# Altium PCB sion.PcbDoc (part 1 of 2)
Units mm, origin at the board's own origin, x right, y up, seen from the top; angles counter-clockwise.
Board outline 144.6 x 80.67 mm, 2 copper layers (Top Layer, Bottom Layer); 226 components, 203 nets, 882 pads, 135 vias.
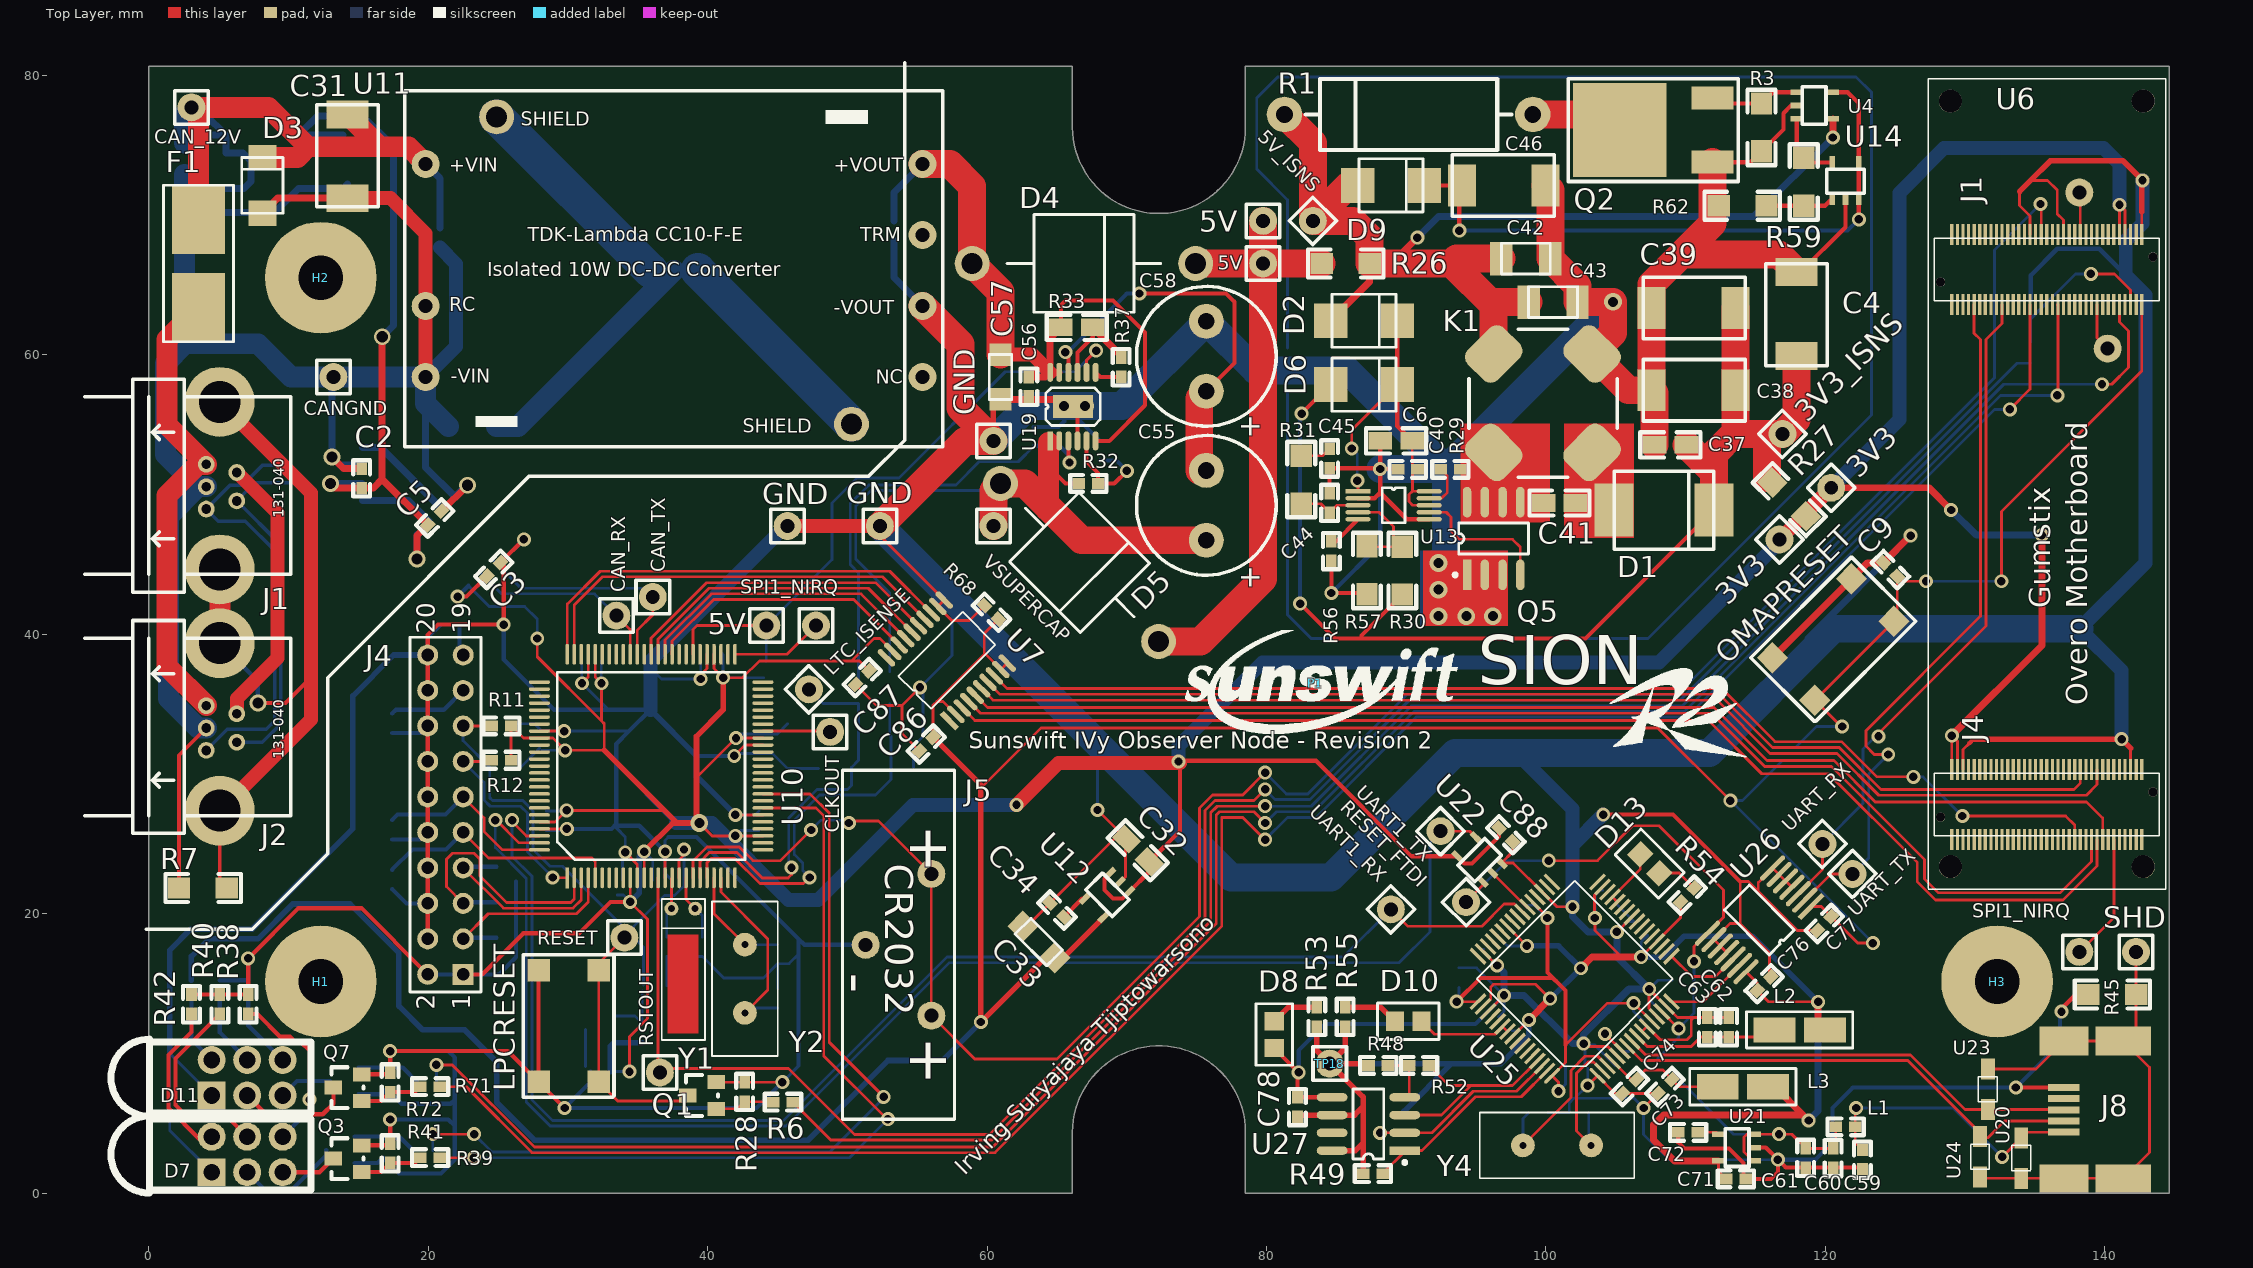
[diagram p0: Top Layer view]
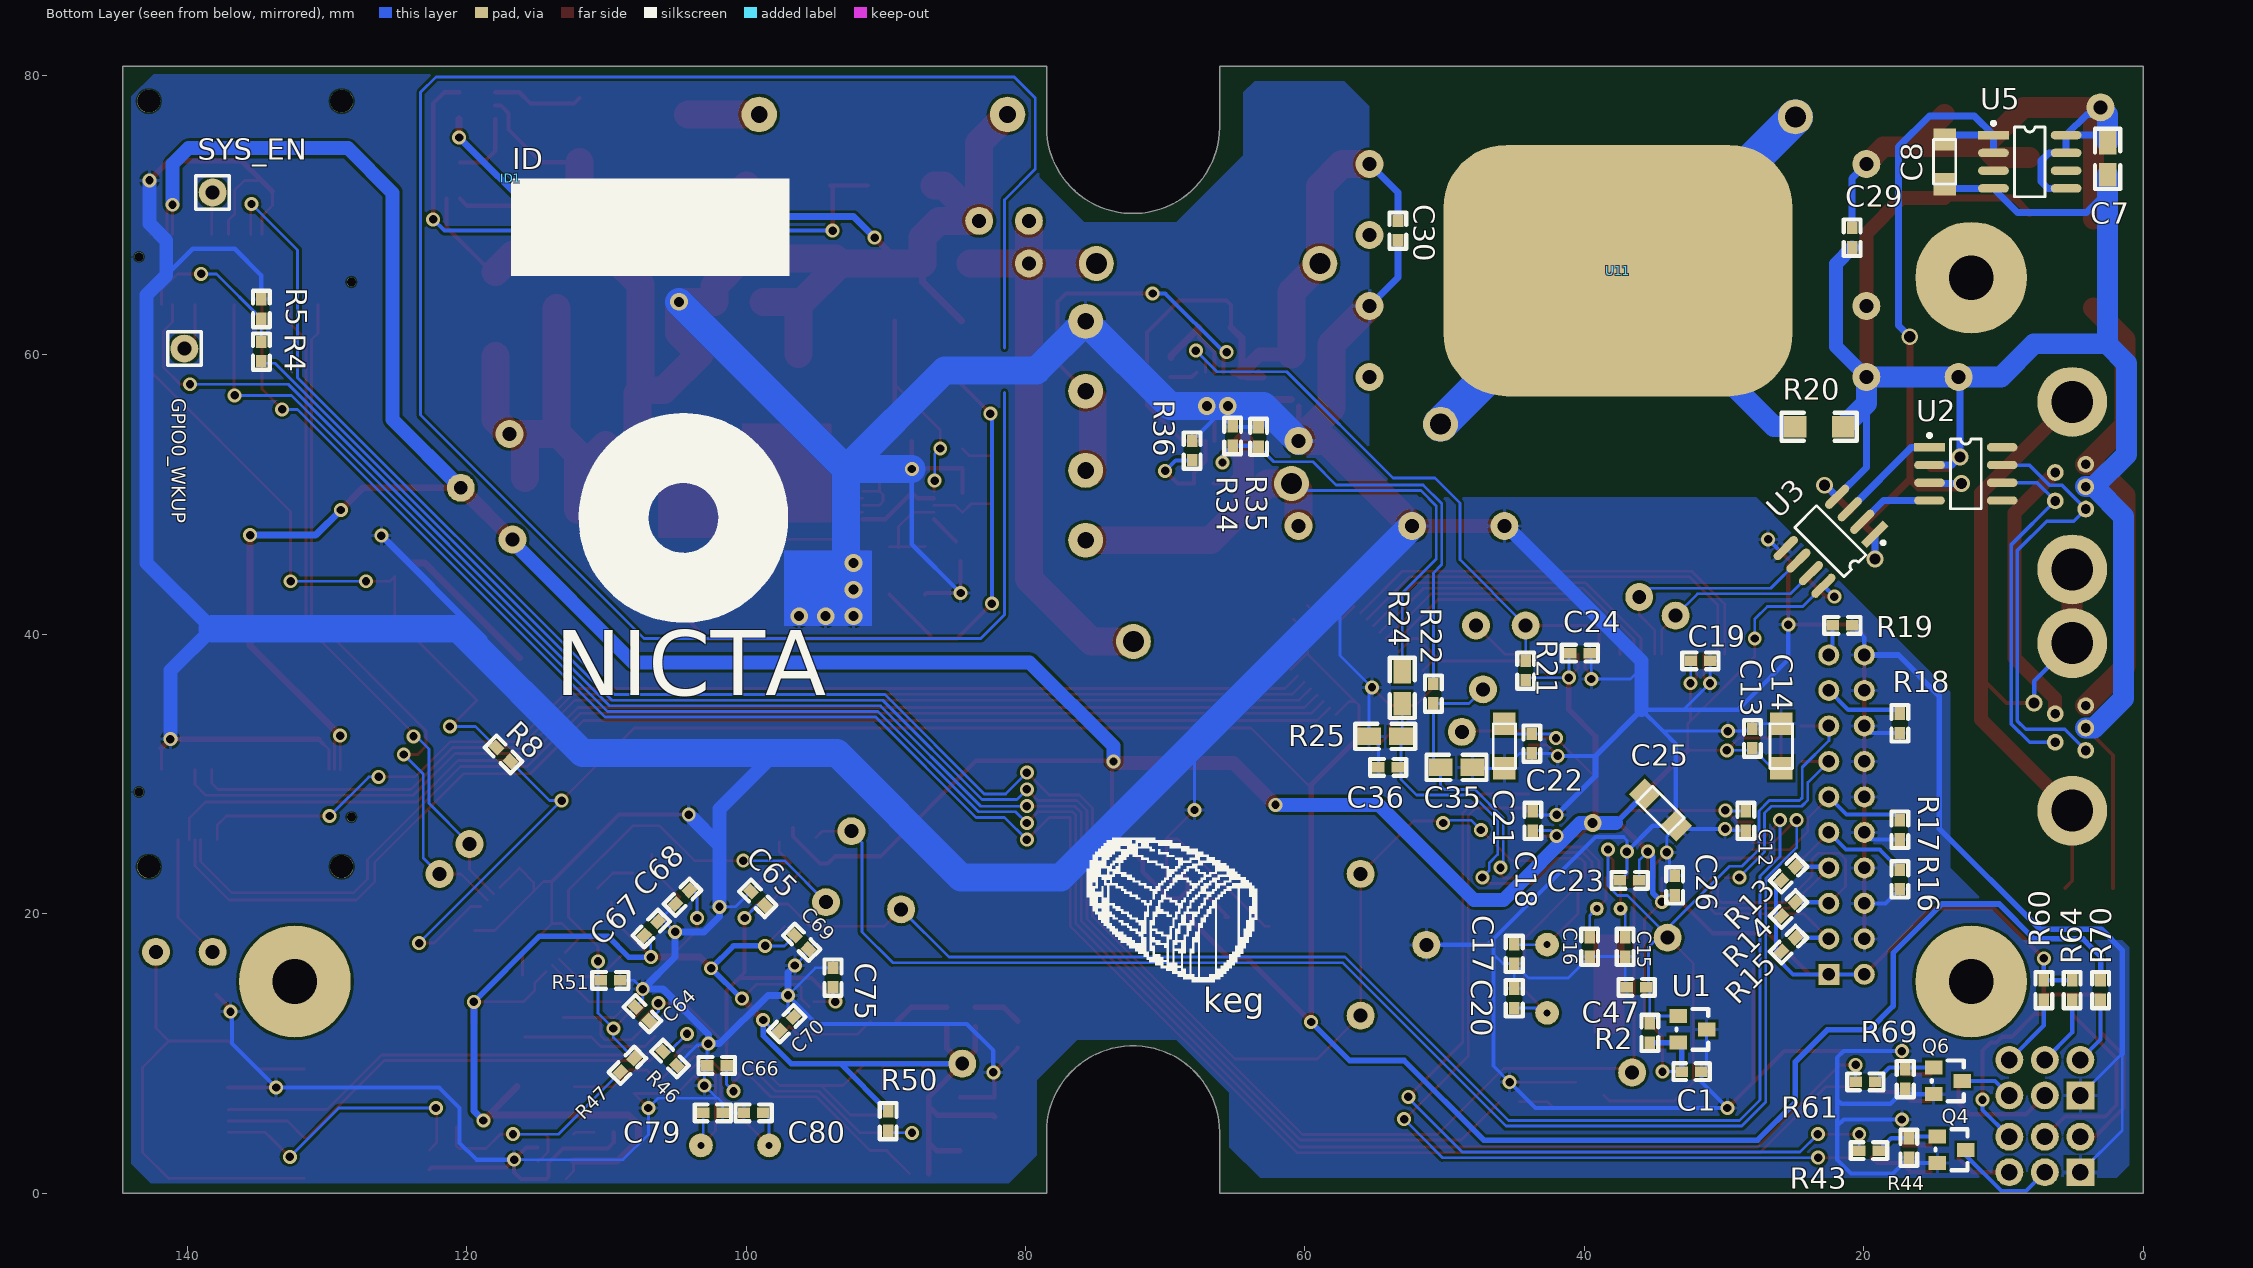
[diagram p1: Bottom Layer view, seen from below]

## Layer stack, top to bottom
Top Layer: signal copper 0.0356
Dielectric: dielectric 0.32, FR-4, Dk 4.8
Bottom Layer: signal copper 0.0356

## Board outline
0,0 0,80.67 66.11,80.67 66.11,76.31 ccw(c72.3,76.31) 78.49,76.31 78.49,80.67 144.6,80.67 144.6,0 78.49,0 78.49,4.36 ccw(c72.3,4.36) 66.11,4.36 66.11,0

## Design rules (kind name [scope] priority, off if disabled: settings)
Clearance Clearance_Overo [(InComponent('U6'))] p1: gap=0.1
Clearance [All] p2: gap=0.2
ComponentClearance [All] p1: gap=0.2 collisioncheckmode=3 verticalgap=0.254 showdistances=FALSE
PolygonConnect [All] p1: connectstyle=Relief reliefconductorwidth=0.254 reliefentries=4 polygonreliefangle="90 Angle"
RoutingVias [All] p1: holewidth=0.4 width=0.8 viastyle="Through Hole" minholewidth=0.4 minwidth=0.8 maxholewidth=1 maxwidth=2
SilkscreenOverComponentPads [All] p1: minsilkscreentomaskgap=0.254
SolderMaskExpansion [All] p1: expansion=0.102
TestPointUsage [All] p1: valid=0 allowmultiple=FALSE
Testpoint [All] p1: side=15 testpointundercomponent=TRUE minsize=1.016 maxsize=2.54 preferedsize=1.524 minholesize=0 maxholesize=1.016 preferedholesize=0.813 testpointgrid=0.025 style=1023 order=0-112345678
Width [All] p1: maxlimit=3 minlimit=0.2 preferedwidth=0.3
22 further rules are at their usual default settings.

## Classes and differential pairs
component class U_usb_isolated_uart_x2: C59 C60 C61 C62 C63 C64 C65 C66 C67 C68 C69 C70 C71 C72 C73 C74 C75 C76 C77 C78 C79 C80 C88 D8 D10 D13 J8 L1 L2 L3 R45 R46 R47 R48 R49 R50 R51 R52 R53 R54 R55 RESET_FTDI SHD TP18 U20 U21 U22 U23 U24 U25 U26 U27 UART1_RX UART1_TX UART_RX UART_TX Y4
component class U_supercap: C55 C56 C57 C58 R32 R33 R34 R35 R36 R37 U19
component class U_sepic: 3V3 3V3_ISNS 5V 5V_ISNS C4 C6 C37 C38 C39 C40 C41 C42 C43 C44 C45 C46 D1 D2 D6 D9 GND K1 Q2 Q5 R1 R3 R26 R27 R29 R30 R31 R56 R57 R59 R62 U4 U13 U14
component class U_powertrain: 3V3 5V C29 C30 C31 C32 C33 C34 C35 C36 CAN_12V CANGND D4 D5 GND J5 LTC_ISENSE R20 R21 R22 R23 R24 R25 U11 U12 VSUPERCAP
component class U_LPC1768: C12 C13 C14 C15 C16 C17 C18 C19 C20 C21 C22 C23 C24 C25 C26 J4 R11 R12 R13 R14 R15 R16 R17 R18 R19 U10 Y1 Y2
component class U_Gumstix_Overo: C9 C10 C11 J3 OMAPRESET R8 R9 R10 U6 U8 U9
component class U_can: C1 C47 C86 C87 CLKOUT D7 LPCRESET Q1 Q3 Q4 R2 R4 R5 R6 R28 R38 R39 R40 R41 R42 R43 R44 R68 RESET RSTOUT U1 U7
component class U_can_transciever_dualvolt_isolated: C2 C3 C5 C7 C8 CAN_RX CAN_TX D3 F1 J1 J2 R7 U2 U3 U5
component class toplevel_os: D11 GPIO0_WKUP H1 H2 H3 H4 ID1 P1 Q6 Q7 R60 R61 R64 R69 R70 R71 R72 SPI1_NIRQ SYS_EN

## Components (designator, comment, footprint, x,y, rotation, side; value= is the part's Value field where it differs from the comment)
3V3 "3V3" TESTPOINT 120.42,50.492 r45 top (schematic designator TP8)
3V3 "VOUT" TESTPOINT 116.711,46.784 r315 top (schematic designator TP5)
3V3_ISNS "3V3" TESTPOINT 116.924,54.344 r45 top (schematic designator TP24)
5V "VSENSE" TESTPOINT 44.196,40.64 r90 top (schematic designator TP11)
5V "5V" TESTPOINT 79.756,66.548 r0 top (schematic designator TP9)
5V "VIN" TESTPOINT 79.756,69.596 r0 top (schematic designator TP6)
5V_ISNS "5V" TESTPOINT 83.312,69.596 r135 top (schematic designator TP15)
C1 "100nF" 0603 33.016,8.7 r180 bottom
C2 "100nF" 0603 15.232,50.468 r90 top
C3 "47nF" 0603 24.188,44.151 r45 top
C4 "150uF" MCCT-CASED 117.94,59.932 r90 top
C5 "47nF" 0603 20.955,48.821 r225 top
C6 "1uF" 0805 90.424,53.848 r180 top
C7 "1uF" 0805 2.54,75.184 r270 bottom
C8 "10uF" MCCT-CASEA 14.212,73.824 r270 bottom
C9 "100nF" 0603 125.148,44.136 r135 top
C12 "100nF" 0603 28.44,25.952 r90 bottom
C13 "100nF" 0603 27.972,31.844 r90 bottom
C14 "10uF" MCCT-CASEA 25.908,32.004 r90 bottom
C15 "18pF" 0603 37.076,18.332 r270 bottom
C16 "18pF" 0603 39.616,18.332 r270 bottom
C17 "18pF" 0603 45.014,17.824 r270 bottom
C18 "100nF" 0603 43.68,25.952 r90 bottom
C19 "100nF" 0603 30.988,38.1 r0 bottom
C20 "18pF" 0603 45.014,13.252 r90 bottom
C21 "10uF" MCCT-CASEA 45.72,32.004 r270 bottom
C22 "100nF" 0603 43.76,31.48 r90 bottom
C23 "100nF" 0603 36.06,22.396 r0 bottom
C24 "100nF" 0603 39.616,38.652 r0 bottom
C25 "10uF" MCCT-CASEA 34.544,27.432 r225 bottom
C26 "100nF" 0603 33.528,21.336 r90 bottom
C29 "100nF" 0603 20.828,69.088 r270 bottom
C30 "100nF" 0603 53.34,69.596 r270 bottom
C31 "100uF" MCCT-CASED 14.224,77.216 r270 top
C32 "1uF" 0805 71.602,23.725 r135 top
C33 "10uF" MCCT-CASEA 63.699,17.977 r135 top
C34 "10nF" 0603 65.495,19.774 r135 top
C35 "1uF" 0805 50.292,30.48 r180 bottom
C36 "100nF" 0603 53.34,30.48 r0 bottom
C37 "1uF" 0805 110.056,53.564 r180 top
C38 "150uF" MCCT-CASED 113.56,57.472 r180 top
C39 "150uF" MCCT-CASED 113.56,63.372 r180 top
C40 "100nF" 0603 89.408,51.816 r0 top
C41 "10uF" 0805 99.816,49.4 r0 top
C42 "22uF" MCCT-CASEB 96.81,66.895 r0 top
C43 "22uF" MCCT-CASEB 98.758,63.787 r0 top
C44 "33p" 0603 84.512,48.716 r90 top
C45 "1n2" 0603 84.512,53.288 r270 top
C46 "470uF" MCCT-CASED 93.98,72.136 r0 top
C47 "100nF" 0603 35.56,14.732 r0 bottom
C55 "3F3" ELECTROLYTIC-5-32 75.692,46.736 r90 top
C56 "100nF" 0603 62.992,58.42 r270 top
C57 "10uF" MCCT-CASEA 60.96,58.42 r270 top
C58 "3F3" ELECTROLYTIC-5-32 75.692,57.404 r90 top
C59 "10nF" 0603 122.652,1.704 r90 top
C60 "100nF" 0603 120.552,3.204 r270 top
C61 "4.7uF" 0603 118.588,3.228 r270 top
C62 "4.7uF" 0603 113.08,11.176 r90 top
C63 "100nF" 0603 111.556,11.176 r90 top
C64 "100nF" 0603 106.925,12.344 r45 bottom
C65 "100nF" 0603 98.663,20.606 r45 bottom
C66 "100nF" 0603 101.396,9.144 r0 bottom
C67 "100nF" 0603 107.284,18.451 r135 bottom
C68 "100nF" 0603 104.051,21.684 r315 bottom
C69 "100nF" 0603 96.508,18.451 r225 bottom
C70 "100nF" 0603 97.586,11.626 r135 bottom
C71 "100nF" 0603 112.896,1.016 r0 top
C72 "10nF" 0603 110.872,4.356 r180 top
C73 "4.7uF" 0603 109.016,8.128 r225 top
C74 "100nF" 0603 106.476,8.128 r225 top
C75 "4.7uF" 0603 93.776,14.732 r90 bottom
C76 "100nF" 0603 116.11,15.488 r225 top
C77 "100nF" 0603 120.421,19.798 r225 top
C78 "100nF" 0603 82.212,5.464 r90 top
C79 "18pF" 0603 103.07,5.753 r180 bottom
C80 "18pF" 0603 98.76,5.753 r0 bottom
C86 "100nF" 0603 55.149,31.652 r45 top
C87 "100nF" 0603 51.557,37.4 r225 top
C88 "100nF" 0603 97.625,25.154 r135 top
CAN_12V "CAN12V" TESTPOINT 3.048,77.724 r0 top (schematic designator TP7)
CAN_RX "RX" TESTPOINT 33.464,41.34 r270 top (schematic designator TP3)
CAN_TX "TX" TESTPOINT 36.068,42.672 r270 top (schematic designator TP4)
CANGND "CANGND" TESTPOINT 13.208,58.42 r90 top (schematic designator TP10)
CLKOUT "CLKOUT" TESTPOINT 48.768,33.02 r90 top (schematic designator TP28)
D1 "SSC53L" SMC 108.452,48.892 r0 top
D2 "MBRS130" SMB 86.968,62.444 r0 top
D3 "SMAJ12A-TR" SMA 8.128,72.136 r90 top
D4 "D SCHOTTKY" DIODE-D1.5mm 58.928,66.548 r0 top
D5 "D SCHOTTKY" DIODE-D1.5mm 60.96,50.8 r315 top
D6 "MBRS130" SMB 86.968,57.872 r0 top
D7 "1882-2781" LED_TRILEVEL 4.5,1.5 r90 top
D8 "LED" 0805LED 80.548,12.304 r270 top
D9 "MBRS130" SMB 88.9,72.136 r0 top
D10 "LED" 0805LED 89.184,12.304 r0 top
D11 "1882-2781" LED_TRILEVEL 4.5,7 r90 top
D13 "LED" 0805LED 108.099,22.915 r135 top
F1 "125mA/3A" LITTELFUSE-154 3.556,66.548 r90 top
GND "GND" TESTPOINT 60.452,53.848 r90 top (schematic designator TP26)
GND "GND" TESTPOINT 52.324,47.752 r90 top (schematic designator TP25)
GND "GND" TESTPOINT 45.72,47.752 r90 top (schematic designator TP14)
GPIO0_WKUP "WKUP" TESTPOINT 140.208,60.452 r90 bottom (schematic designator TP17)
H1 "HOLE" #6 12.305,15.145 r0 top locked
H2 "HOLE" #6 12.305,65.525 r0 top locked
H3 "HOLE" #6 132.295,15.145 r0 top locked
ID1 "IDBOX" IDBOX 116.84,72.644 r180 bottom
J1 "CON5-S" TRIAD5F 6.296,51.584 r90 top
J2 "CON5-S" TRIAD5F 6.296,34.312 r90 top
J4 "ARM JTAG" HDR2X10 22.496,15.664 r90 top
J5 "CR2032" CR2032_VERTICAL 51.308,17.78 r270 top
J8 "USB_MINIB" USB_MINIB 137.068,5.964 r180 top
K1 "10uH" CTX2 96.26,60.068 r315 top
L1 "FERRITE" 0603 122.144,4.752 r180 top
L2 "2.2uH" 1210 118.16,11.684 r180 top
L3 "2.2uH" 1210 114.096,7.62 r180 top
LPCRESET "B3FS" B3FS-1052 33.02,16.764 r270 top
LTC_ISENSE "ISENSE" TESTPOINT 47.244,36.068 r135 top (schematic designator TP12)
OMAPRESET "B3FS" B3FS-1052 126.059,40.918 r225 top
P1 "SUN_LOGO" SUNSWIFTLOGO 83.488,36.492 r0 top
Q1 "ZXM61N02F" SOT23-3 40.612,6.04 r90 top
Q2 "S6006DS2CT-ND" DPAK_N-MOSFET 105.268,76.096 r90 top
Q3 "ZXM61N02F" SOT23-3 15.24,1.524 r90 top
Q4 "ZXM61N02F" SOT23-3 14.732,4.064 r270 bottom
Q5 "Si7882DP" SO8 96.26,46.86 r0 top
Q6 "ZXM61N02F" SOT23-3 14.996,8.988 r270 bottom
Q7 "ZXM61N02F" SOT23-3 15.24,6.604 r90 top
R1 "10R" DIODE0.7 99.06,77.216 r180 top
R2 "10K" 0603 35.312,12.172 r270 bottom
R3 "100K" 1206 115.428,74.572 r90 top
R4 "10K" 0603 134.698,60.937 r270 bottom
R5 "10K" 0603 134.698,63.985 r270 bottom
R6 "100R" 0603 44.692,6.516 r0 top
R7 "0R" 1206 5.588,21.844 r180 top
R8 "10K" 0603 117.856,31.9 r225 bottom
R11 "10k" 0603 24.528,33.444 r0 top
R12 "10k" 0603 24.528,30.988 r0 top
R13 "10k" 0603 24.892,23.368 r315 bottom
R14 "10k" 0603 24.892,20.828 r315 bottom
R15 "10k" 0603 24.892,18.288 r315 bottom
R16 "10k" 0603 17.416,21.76 r90 bottom
R17 "10k" 0603 17.416,25.316 r90 bottom
R18 "10k" 0603 17.416,32.936 r90 bottom
R19 "10k" 0603 20.828,40.64 r0 bottom
R20 "0R" 1206 24.892,54.864 r180 bottom
R21 "4k7" 0603 44.196,38.1 r270 bottom
R22 "3k3" 0603 50.8,35.052 r90 bottom
R24 "10k" 0805 53.028,37.32 r270 bottom
R25 "10k" 0805 55.404,32.7 r180 bottom
R26 "0R01" 1206 87.376,66.548 r180 top
R27 "0R01" 1206 118.616,48.442 r135 top
R28 "10K" 0603 42.644,6.548 r90 top
R29 "80R" 0603 92.456,51.816 r0 top
R30 "17K4" 1206 89.724,46.276 r270 top
R31 "26K" 1206 82.48,52.78 r270 top
R32 "309K" 0603 66.548,50.8 r0 top
R33 "173K" 0805 67.564,61.976 r180 top
R34 "1K" 0603 65.168,53.496 r90 bottom
R35 "1K" 0603 63.316,53.436 r90 bottom
R36 "100K" 0603 68.072,53.848 r270 bottom
R37 "100K" 0603 69.596,58.42 r90 top
R38 "220R" 0603 7.112,14.224 r270 top
R39 "100R" 0603 20.828,2.54 r180 top
R40 "220R" 0603 5.08,14.224 r270 top
R41 "10K" 0603 17.272,3.556 r270 top
R42 "220R" 0603 3.048,14.224 r270 top
R43 "100R" 0603 20.32,3.048 r180 bottom
R44 "10K" 0603 16.764,2.54 r90 bottom
R45 "0R" 1206 142.24,14.224 r180 top
R46 "12k" 0603 104.952,9.144 r45 bottom
R47 "4k7" 0603 108,9.652 r315 bottom
R48 "10k" 0603 88.696,9.144 r180 top
R49 "10k" 0603 88.308,1.4 r180 top
R50 "10k" 0603 89.832,4.456 r90 bottom
R51 "10k" 0603 109.016,15.24 r0 bottom
R52 "2k2" 0603 90.22,9.144 r0 top
R53 "1k" 0603 83.596,13.32 r270 top
R54 "1k" 0603 110.613,21.837 r225 top
R55 "1k" 0603 85.628,13.32 r270 top
R56 "65K" 0603 84.644,45.26 r90 top
R57 "10K" 1206 87.184,42.876 r90 top
R59 "11K3" 1206 118.452,70.676 r90 top
R60 "220R" 0603 7.112,15.24 r270 bottom
R61 "100R" 0603 20.584,7.972 r180 bottom
R62 "10K" 1206 112.356,70.676 r0 top
R64 "220R" 0603 5.08,15.24 r270 bottom
R68 "1k" 0603 59.819,42.069 r315 top
R69 "10K" 0603 17.028,7.464 r90 bottom
R70 "100R" 0603 3.048,15.24 r270 bottom
R71 "100R" 0603 20.828,7.62 r180 top
R72 "10K" 0603 17.272,8.636 r270 top
RESET "RESET" TESTPOINT 34.036,18.288 r0 top (schematic designator TP1)
RESET_FTDI "FTDI_RST" TESTPOINT 94.284,20.828 r135 top (schematic designator TP23)
RSTOUT "RSTOUT" TESTPOINT 36.576,8.636 r0 top (schematic designator TP2)
SHD "SHD" TESTPOINT 142.24,17.272 r90 top (schematic designator TP21)
SPI1_NIRQ "SPI_NIRQ_OMAP" TESTPOINT 138.176,17.272 r90 top (schematic designator TP30)
SPI1_NIRQ "SPI1_NIRQ_LPC" TESTPOINT 47.752,40.64 r90 top (schematic designator TP29)
SYS_EN "SYS_EN" TESTPOINT 138.176,71.628 r90 bottom (schematic designator TP16)
TP18 "3V3USB" TESTPOINT 84.524,9.272 r0 top
U1 "MCP120T-300I/TT" SOT23-3 33.28,12.68 r270 bottom
U2 "SN65HVD232" SO8 12.692,51.484 r270 bottom
U3 "IL712-3E" SO8 22.392,46.666 r45 bottom
U4 "MAX9100" SOT23-5 117.944,78.804 r270 top
U5 "MIC5200" SO8 8.116,73.824 r270 bottom
U6 "Overo" Overo-bare 142.748,23.368 r90 top
U7 "TXB0108PWR" TSSOP20 57.304,33.808 r135 top
U10 "LPC1768" QFP100 29.952,22.576 r90 top
U11 "TDK-LAMBDA CC-E" CC10-F-E 19.812,58.42 r0 top
U12 "MIC5247" SOT23-5 70.165,21.57 r135 top
U13 "ADP1621" MSOP10 86.544,50.24 r0 top
U14 "MAX6037CAUKADJ" SOT23-5 120.484,71.184 r0 top
U19 "LTC4425" MS-12 64.516,53.848 r90 top
U20 "PESD5V0X" SOD323 134.02,1.064 r0 top
U21 "REG113-33" SOT23-5 114.932,2.312 r90 top
U22 "SN74AHC1G126" SOT23-5 95.47,22.281 r45 top
U23 "PESD5V0X" SOD323 131.628,5.996 r0 top
U24 "PESD5V0X" SOD323 131.064,4.064 r180 top
U25 "FT2232H" QFP64 103.692,8.393 r135 top
U26 "TXB104PWR" TSSOP14-L 118.984,20.517 r225 top
U27 "93LC46BT-I/SN" SO8 87.292,4.956 r90 top
UART1_RX "RXD3V3" TESTPOINT 88.9,20.32 r45 top (schematic designator TP27)
UART1_TX "TXD3V3" TESTPOINT 92.456,25.908 r45 top (schematic designator TP19)
UART_RX "RXD1V8" TESTPOINT 119.788,25.001 r135 top (schematic designator TP20)
UART_TX "TXD1V8" TESTPOINT 121.943,22.846 r45 top (schematic designator TP22)
VSUPERCAP "VCAP" TESTPOINT 60.452,47.752 r90 top (schematic designator TP13)
Y1 "32.768 KHz" WATCHA 39.108,20.364 r180 top
Y2 "12 MHz" HC49/4H 42.664,20.872 r270 top
Y4 "12 MHz" HC49/4H 95.263,3.42 r0 top

## Footprints (in the part's own frame and the unit in brackets; to place one, negate y for a bottom-side part, rotate by r counter-clockwise, add the part's x,y. Pads: shape width x height; smd on the part's side, far side on the other; paste and mask are expansions set on the pad)
0603 [mil]
  rect 35.43x30 smd: 1(0,0) 2(55,0)
  silkscreen extent -24,-24 79,24
0805 [mm]
  rect 1.7x1.27 smd: 1(0,0) 2(2.286,0)
  silkscreen extent -1,-0.9 3.3,0.9
0805LED [mm]
  rect 1.3x1.4 smd: A(0,0) K(1.9,0)
  silkscreen extent -1.25,-1.3 3.15,1.3
1206 [mil]
  rect 62.99x60 smd: 1(0,0) 2(135,0)
  silkscreen extent -39,-39 173,39
1210 [mm]
  rect 3x1.8 smd: 1(-1.8,0) 2(1.8,0)
  silkscreen extent -3.8,-1.3 3.8,1.3
#6 [mm]
  round 8 hole 3.2: 1(0,0)
B3FS-1052 [mm] "SMD SPNO tactile switch"
  rect 1.6x1.6 smd: 1(0.8,-0.825) 2(8.8,-0.825) 3(0.8,-5.125) 4(8.8,-5.125)
  silkscreen extent -0.3,-6.22 9.9,0.28
CC10-F-E [mm]
  round 2 hole 1: 1(0,15.24) 2(0,5.08) 3(0,0) 4(35.56,0) 5(35.56,5.08) 6(35.56,10.16) 7(35.56,15.24)
  round 2.5 hole 1.5: 8(5.08,18.62) 8(30.48,-3.38)
  rrect50% 25x18 smd far side: 8(17.78,7.62)
  Bottom Layer lines w2.5: 5.08,18.62 16.08,7.62 ; 19.48,7.62 30.48,-3.38
  silkscreen extent -1.5,-5 37,20.5
CR2032_VERTICAL [mm] "VBH2032-1-LF Coin cell vertical holder"
  round 2 hole 1: 1(-5.075,4.7) 1(5.075,4.7) 2(0,0)
  silkscreen extent -12.5,-1.65 12.5,6.35
CTX2 [mm] "Coupled Inductors"
  rrect50% 3.05x3.68 smd: 1(0,0) 3(9.96,0)
  rrect50% 3.68x3.05 smd: 2(4.98,-4.98) 4(4.98,4.98)
  silkscreen extent 0,-5 10,5
DIODE0.7 [mm]
  round 2.54 hole 1.2: 1(0,0) 2(17.78,0)
  silkscreen extent 1.52,-2.54 16.26,2.54
DIODE-D1.5mm [mm]
  round 2.5 hole 1.5: A(0,0) K(16,0)
  silkscreen extent 2.5,-3.5 13.5,3.5
DPAK_N-MOSFET [mm] "STD12NF06L"
  rect 1.65x3 smd: 1(-2.3,-6.65) 3(2.3,-6.65)
  rect 6.7x6.7 smd: 2(0,0)
  silkscreen extent -3.68,-8.51 3.68,3.68
ELECTROLYTIC-5-32 [mm] "Supercapacitor"
  round 2.5 hole 1.2: 1(0,0) 2(5,0)
  silkscreen extent -2.5,-5 7.5,5
HC49/4H [mm]
  round 1.7 hole 0.5: 1(3.085,0) 2(7.965,0)
  silkscreen extent 0,-2.35 11.05,2.35
HDR2X10 [mm] "Connector; Header; 10x2 Position"
  rect 1.5x1.5 hole 0.9: 1(0,0)
  round 1.5 hole 0.9: 2(0,2.54) 3(2.54,0) 4(2.54,2.54) 5(5.08,0) 6(5.08,2.54) 7(7.62,0) 8(7.62,2.54) 9(10.16,0) 10(10.16,2.54) 11(12.7,0) 12(12.7,2.54) 13(15.24,0) 14(15.24,2.54) 15(17.78,0) 16(17.78,2.54) 17(20.32,0) 18(20.32,2.54) 19(22.86,0) 20(22.86,2.54)
  silkscreen extent -1.27,-1.27 24.13,3.81
IDBOX [mm] "Infobox"
  silkscreen extent 0,-7 19.95,0
LED_TRILEVEL [mm]
  rect 2x2 hole 1.2: 1(0,0)
  round 2 hole 1.2: 2(0,-2.54) 3(0,-5.08) 4(2.54,-5.08) 5(2.54,-2.54) 6(2.54,0)
  silkscreen extent -1.49,-7.11 4.03,7.21
LITTELFUSE-154 [mm]
  rect 5x3.81 smd: 1(-3.185,0) 2(3.185,0)
  silkscreen extent -5.6,-2.51 5.6,2.5
MCCT-CASEA [mm]
  rect 1.6x1.6 smd: 1(-1.6,0) 2(1.6,0)
  silkscreen extent -1.6,-0.8 1.6,0.8
MCCT-CASEB [mm]
  rect 1.6x2.4 smd: 1(0,0) 2(3.5,0)
  silkscreen extent 0,-1.1 3.5,1.1
MCCT-CASED [mm]
  rect 2x3 smd: 1(0,0) 2(6,0)
  silkscreen extent -0.7,-2.2 6.6,2.2
MS-12 [mm] "LTC4425"
  rect 1.364x0.42 smd: 1(0,0)
  oval 1.364x0.42 smd: 2(0,-0.65) 3(0,-1.3) 4(0,-1.95) 5(0,-2.6) 6(0,-3.25) 7(4.9,-3.25) 8(4.9,-2.6) 9(4.9,-1.95) 10(4.9,-1.3) 11(4.9,-0.65) 12(4.9,0)
  rect 1.651x2.845 smd: 13(2.45,-1.625)
  silkscreen extent 1.1,-3.58 3.8,0.33
MSOP10 [mm] "ADM1191"
  rect 1.8x0.3 smd: 1(0,0)
  oval 1.8x0.3 smd: 2(0,-0.5) 3(0,-1) 4(0,-1.5) 5(0,-2) 6(5.1,-2) 7(5.1,-1.5) 8(5.1,-1) 9(5.1,-0.5) 10(5.1,0)
  silkscreen extent 1.73,-2.25 3.37,0.25
Overo-bare [mm] "Gumstix Overo Motherboard placement"
  round 1.65 hole 1.65 unplated: 0(0,13.8) 0(0,0) 0(54.8,0) 0(54.8,13.8)
  round 0.65 hole 0.65: 0(3.55,14.5) 0(5.35,-0.7) 0(41.85,14.5) 0(43.65,-0.7)
  rect 1.5x0.23 smd: J1_1(40.25,0.1) J1_2(40.25,0.5) J1_3(40.25,0.9) J1_4(40.25,1.3) J1_5(40.25,1.7) J1_6(40.25,2.1) J1_7(40.25,2.5) J1_8(40.25,2.9) J1_9(40.25,3.3) J1_10(40.25,3.7) J1_11(40.25,4.1) J1_12(40.25,4.5) J1_13(40.25,4.9) J1_14(40.25,5.3) J1_15(40.25,5.7) J1_16(40.25,6.1) J1_17(40.25,6.5) J1_18(40.25,6.9) J1_19(40.25,7.3) J1_20(40.25,7.7) J1_21(40.25,8.1) J1_22(40.25,8.5) J1_23(40.25,8.9) J1_24(40.25,9.3) J1_25(40.25,9.7) J1_26(40.25,10.1) J1_27(40.25,10.5) J1_28(40.25,10.9) J1_29(40.25,11.3) J1_30(40.25,11.7) J1_31(40.25,12.1) J1_32(40.25,12.5) J1_33(40.25,12.9) J1_34(40.25,13.3) J1_35(40.25,13.7) J1_36(45.25,13.7) J1_37(45.25,13.3) J1_38(45.25,12.9) J1_39(45.25,12.5) J1_40(45.25,12.1) J1_41(45.25,11.7) J1_42(45.25,11.3) J1_43(45.25,10.9) J1_44(45.25,10.5) J1_45(45.25,10.1) J1_46(45.25,9.7) J1_47(45.25,9.3) J1_48(45.25,8.9) J1_49(45.25,8.5) J1_50(45.25,8.1) J1_51(45.25,7.7) J1_52(45.25,7.3) J1_53(45.25,6.9) J1_54(45.25,6.5) J1_55(45.25,6.1) J1_56(45.25,5.7) J1_57(45.25,5.3) J1_58(45.25,4.9) J1_59(45.25,4.5) J1_60(45.25,4.1) J1_61(45.25,3.7) J1_62(45.25,3.3) J1_63(45.25,2.9) J1_64(45.25,2.5) J1_65(45.25,2.1) J1_66(45.25,1.7) J1_67(45.25,1.3) J1_68(45.25,0.9) J1_69(45.25,0.5) J1_70(45.25,0.1) J4_1(6.95,13.7) J4_2(6.95,13.3) J4_3(6.95,12.9) J4_4(6.95,12.5) J4_5(6.95,12.1) J4_6(6.95,11.7) J4_7(6.95,11.3) J4_8(6.95,10.9) J4_9(6.95,10.5) J4_10(6.95,10.1) J4_11(6.95,9.7) J4_12(6.95,9.3) J4_13(6.95,8.9) J4_14(6.95,8.5) J4_15(6.95,8.1) J4_16(6.95,7.7) J4_17(6.95,7.3) J4_18(6.95,6.9) J4_19(6.95,6.5) J4_20(6.95,6.1) J4_21(6.95,5.7) J4_22(6.95,5.3) J4_23(6.95,4.9) J4_24(6.95,4.5) J4_25(6.95,4.1) J4_26(6.95,3.7) J4_27(6.95,3.3) J4_28(6.95,2.9) J4_29(6.95,2.5) J4_30(6.95,2.1) J4_31(6.95,1.7) J4_32(6.95,1.3) J4_33(6.95,0.9) J4_34(6.95,0.5) J4_35(6.95,0.1) J4_36(1.95,0.1) J4_37(1.95,0.5) J4_38(1.95,0.9) J4_39(1.95,1.3) J4_40(1.95,1.7) J4_41(1.95,2.1) J4_42(1.95,2.5) J4_43(1.95,2.9) J4_44(1.95,3.3) J4_45(1.95,3.7) J4_46(1.95,4.1) J4_47(1.95,4.5) J4_48(1.95,4.9) J4_49(1.95,5.3) J4_50(1.95,5.7) J4_51(1.95,6.1) J4_52(1.95,6.5) J4_53(1.95,6.9) J4_54(1.95,7.3) J4_55(1.95,7.7) J4_56(1.95,8.1) J4_57(1.95,8.5) J4_58(1.95,8.9) J4_59(1.95,9.3) J4_60(1.95,9.7) J4_61(1.95,10.1) J4_62(1.95,10.5) J4_63(1.95,10.9) J4_64(1.95,11.3) J4_65(1.95,11.7) J4_66(1.95,12.1) J4_67(1.95,12.5) J4_68(1.95,12.9) J4_69(1.95,13.3) J4_70(1.95,13.7)
  silkscreen extent -1.6,-1.6 56.4,15.4
QFP64 [mm]
  oval 1.5x0.25 smd: 1(0.008,-0.005)
  rect 1.5x0.25 smd: 2(0.008,-0.505) 3(0.008,-1.005) 4(0.008,-1.505) 5(0.008,-2.005) 6(0.008,-2.505) 7(0.008,-3.005) 8(0.008,-3.505) 9(0.008,-4.005) 10(0.008,-4.505) 11(0.008,-5.005) 12(0.008,-5.505) 13(0.008,-6.005) 14(0.008,-6.505) 15(0.008,-7.005) 16(0.008,-7.505) 33(12.108,-7.505) 34(12.108,-7.005) 35(12.108,-6.505) 36(12.108,-6.005) 37(12.108,-5.505) 38(12.108,-5.005) 39(12.108,-4.505) 40(12.108,-4.005) 41(12.108,-3.505) 42(12.108,-3.005) 43(12.108,-2.505) 44(12.108,-2.005) 45(12.108,-1.505) 46(12.108,-1.005) 47(12.108,-0.505) 48(12.108,-0.005)
  rect 0.25x1.5 smd: 17(2.308,-9.805) 18(2.808,-9.805) 19(3.308,-9.805) 20(3.808,-9.805) 21(4.308,-9.805) 22(4.808,-9.805) 23(5.308,-9.805) 24(5.808,-9.805) 25(6.308,-9.805) 26(6.808,-9.805) 27(7.308,-9.805) 28(7.808,-9.805) 29(8.308,-9.805) 30(8.808,-9.805) 31(9.308,-9.805) 32(9.808,-9.805) 49(9.808,2.295) 50(9.308,2.295) 51(8.808,2.295) 52(8.308,2.295) 53(7.808,2.295) 54(7.308,2.295) 55(6.808,2.295) 56(6.308,2.295) 57(5.808,2.295) 58(5.308,2.295) 59(4.808,2.295) 60(4.308,2.295) 61(3.808,2.295) 62(3.308,2.295) 63(2.808,2.295)
  oval 0.25x1.5 smd: 64(2.308,2.295)
  silkscreen extent 1.09,-8.72 11.02,1.21
QFP100 [mm]
  rect 1.5x0.25 smd: 1(0,0)
  oval 1.5x0.25 smd: 2(0,-0.5) 3(0,-1) 4(0,-1.5) 5(0,-2) 6(0,-2.5) 7(0,-3) 8(0,-3.5) 9(0,-4) 10(0,-4.5) 11(0,-5) 12(0,-5.5) 13(0,-6) 14(0,-6.5) 15(0,-7) 16(0,-7.5) 17(0,-8) 18(0,-8.5) 19(0,-9) 20(0,-9.5) 21(0,-10) 22(0,-10.5) 23(0,-11) 24(0,-11.5) 25(0,-12) 51(16,-12) 52(16,-11.5) 53(16,-11) 54(16,-10.5) 55(16,-10) 56(16,-9.5) 57(16,-9) 58(16,-8.5) 59(16,-8) 60(16,-7.5) 61(16,-7) 62(16,-6.5) 63(16,-6) 64(16,-5.5) 65(16,-5) 66(16,-4.5) 67(16,-4) 68(16,-3.5) 69(16,-3) 70(16,-2.5) 71(16,-2) 72(16,-1.5) 73(16,-1) 74(16,-0.5) 75(16,0)
  oval 0.25x1.5 smd: 26(2,-14) 27(2.5,-14) 28(3,-14) 29(3.5,-14) 30(4,-14) 31(4.5,-14) 32(5,-14) 33(5.5,-14) 34(6,-14) 35(6.5,-14) 36(7,-14) 37(7.5,-14) 38(8,-14) 39(8.5,-14) 40(9,-14) 41(9.5,-14) 42(10,-14) 43(10.5,-14) 44(11,-14) 45(11.5,-14) 46(12,-14) 47(12.5,-14) 48(13,-14) 49(13.5,-14) 50(14,-14) 76(14,2) 77(13.5,2) 78(13,2) 79(12.5,2) 80(12,2) 81(11.5,2) 82(11,2) 83(10.5,2) 84(10,2) 85(9.5,2) 86(9,2) 87(8.5,2) 88(8,2) 89(7.5,2) 90(7,2) 91(6.5,2) 92(6,2) 93(5.5,2) 94(5,2) 95(4.5,2) 96(4,2) 97(3.5,2) 98(3,2) 99(2.5,2) 100(2,2)
  silkscreen extent 1.28,-12.71 14.71,0.72
SMA [mm]
  rect 1.8x2 smd: A(-2,0) K(2,0)
  silkscreen extent -2,-1.48 2,1.48
SMB [mm]
  rect 2.4x2.5 smd: A(-2.385,0) K(2.385,0)
  silkscreen extent -2.29,-1.9 2.3,1.9
SMC [mil]
  rect 110x150 smd: A(-140.5,0) K(140.5,0)
  silkscreen extent -140,-110 140,110
SO8 [mm]
  rect 0.6x2.2 smd: 1(-1.905,-2.6)
  oval 0.6x2.2 smd: 2(-0.635,-2.6) 3(0.635,-2.6) 4(1.905,-2.6) 5(1.905,2.6) 6(0.635,2.6) 7(-0.635,2.6) 8(-1.905,2.6)
  silkscreen extent -2.88,-2.72 2.5,1.1
SOD323 [mm]
  rect 1x1.5 smd: 0(0,0) 1(0,2.9)
  silkscreen extent -0.67,0.55 0.67,2.35
SOT23-3 [mm]
  rect 1x1.25 smd: 1(0,0) 2(1.905,0) 3(0.965,2.032)
  silkscreen extent -0.51,-0.13 2.41,2.16
SOT23-5 [mm]
  rect 0.4x0.9 smd: 1(0,0) 2(0.953,0) 3(1.91,0) 4(1.91,2.59) 5(0,2.59)
  silkscreen extent -0.4,0.4 2.3,2.1
SUNSWIFTLOGO [mm] "Sunswift Logo"
  silkscreen extent -9.32,-3.58 10.19,3.81
TESTPOINT [mm] "Test point pad"
  round 2 hole 1: 0(0,0)
  silkscreen extent -1.2,-1.2 1.2,1.2
TRIAD5F [mm]
  round 5 hole 3: 0(-6.934,1.219) 0(5.055,1.219)
  round 1.2 hole 0.7: 1(0,0) 2(0.584,2.184) 3(-1.016,2.184) 4(-2.616,2.184) 5(-2.032,0)
  silkscreen extent -8.56,-3.86 6.68,10.87
TSSOP14-L [mm] "TSSOP14 extra long pads"
  rect 2.4x0.35 smd: 1(0,0)
  oval 2.4x0.35 smd: 2(0,-0.65) 3(0,-1.3) 4(0,-1.95) 5(0,-2.6) 6(0,-3.25) 7(0,-3.9) 8(6.6,-3.9) 9(6.6,-3.25) 10(6.6,-2.6) 11(6.6,-1.95) 12(6.6,-1.3) 13(6.6,-0.65) 14(6.6,0)
  silkscreen extent 2.03,-4.23 4.57,0.33
TSSOP20 [mm]
  rect 1.6x0.4 smd: 1(0,0)
  oval 1.6x0.4 smd: 2(0,-0.65) 3(0,-1.3) 4(0,-1.95) 5(0,-2.6) 6(0,-3.25) 7(0,-3.9) 8(0,-4.55) 9(0,-5.2) 10(0,-5.85) 11(6.38,-5.85) 12(6.38,-5.2) 13(6.38,-4.55) 14(6.38,-3.9) 15(6.38,-3.25) 16(6.38,-2.6) 17(6.38,-1.95) 18(6.38,-1.3) 19(6.38,-0.65) 20(6.38,0)
  silkscreen extent 1.53,-6.18 4.85,0.32
USB_MINIB [mm] "USB Mini B connector SMT"
  rect 2.25x0.5 smd mask+0: 1(0,1.6) 2(0,0.8) 3(0,0) 4(0,-0.8) 5(0,-1.6)
  rect 1.2x6.4 on Top Overlay mask+0: 2(-7.052,0)
  rect 4x2.05 smd mask+0: 6(-4.25,4.925) 6(-4.25,-4.925)
  rect 3.5x2.05 smd mask+0: 6(0,4.925) 6(0,-4.925)
WATCHA [mm]
  round 1 hole 0.5: 1(0,0) 2(1.7,0)
  Top Layer region: -0.25,1.85 2,1.85 2,8.95 -0.25,8.95
  silkscreen extent -0.7,-0.7 2.4,9.4

## Part data
3V3 3V3 3V3_ISNS 5V 5V 5V 5V_ISNS CAN_12V CAN_RX CAN_TX CANGND CLKOUT GND GND GND GPIO0_WKUP LTC_ISENSE RESET RESET_FTDI RSTOUT SHD SPI1_NIRQ SPI1_NIRQ SYS_EN TP18 UART1_RX UART1_TX UART_RX UART_TX VSUPERCAP: library part TEST, "TEST POINT"
C1 C2 C3 C5 C6 C7 C9 C12 C13 C15 C16 C17 C18 C19 C20 C22 C23 C24 C26 C29 C30 C32 C34 C35 C36 C37 C40 C44 C45 C47 C56 C59 C60 C61 C62 C63 C64 C65 C66 C67 C68 C69 C70 C71 C72 C73 C74 C75 C76 C77 C78 C79 C80 C86 C87 C88: library part CAP, "Capacitor"
C4 C8 C14 C21 C25 C31 C33 C38 C39 C42 C43 C46 C57: library part "CAP POL3", "Polarized Capacitor (Surface Mount)"
C41: library part CAP, "grm21br61a106k"
C55 C58: library part CAP-POL, "Supercap"
D1 D2 D6 D9: library part "D SCHOTTKY", "Schottky Diode"
D3: library part DIODE, "12V TVS Diode"
D4 D5: "Schottky Diode"
D7 D11: library part LED-TRILEVEL, "Three level LED"
F1: library part FUSE2, "Fuse"
H1 H2 H3: "Hole"
J1 J2: "Connector, 2 pin, with shield @ S"
J4: library part "Header 10X2", "Header, 10-Pin, Dual row"
J5: "Battery Coin CR2032 3V"
J8: library part USB_miniB_SMT, "USB Mini B Connector"
K1: library part CTX10-2-R, "Coupled Power Inductor"
L1 L2 L3: library part INDUCTOR, "Inductor"
LPCRESET OMAPRESET: "SMD tactile switch"
Q1 Q3 Q4 Q6 Q7: "1.7A, 20V N-Channel Enhancement mode FET"
Q2: library part SCR, "Sensitive SCR"
Q5: "Power N mosfet"
R1 R2 R3 R4 R5 R6 R7 R8 R11 R12 R13 R14 R15 R16 R17 R18 R19 R20 R21 R22 R24 R25 R26 R27 R28 R29 R30 R31 R32 R33 R34 R35 R36 R37 R38 R39 R40 R41 R42 R43 R44 R45 R46 R47 R48 R49 R50 R51 R52 R53 R54 R55 R56 R57 R59 R60 R61 R62 R64 R68 R69 R70 R71 R72: library part RES1, "Resistor"
U1: library part MCP120T, "Voltage Supervisor"
U2: "3.3V CAN Transciever"
U3: library part IL712, "IL712 Optical Isolator"
U4: library part MAX9100EUK, "Micropower comparator"
U5: "MIC5200 - SO8"
U6: "Gumstix Overo Motherboard"
U7: "4 bit bidirectional auto direction sense level translator"
U10: "NXP Cortex-M3 Microcontroller, 100pin 100MHz"
U11: library part CC10-F-E, "Isolated DC-DC Converter"
U12: "150mA Low-Voltage Linear Regulator"
U13: "SEPIC / Boost Controller"
U14: "Adjustable voltage reference"
U19: "Supercapacitor Charger"
U20 U23 U24: "Ultra low capacitance bidirectional ESD protection diodes"
U21: "400mA Low-Dropout Regulator"
U22: "Single Bus Buffer Gate with 3 State Output"
U25: "Dual USB to UART/FIFO"
U26: library part TXB0104PWR, "4 bit bidirectional auto direction sense level translator"
U27: "Serial EEPROM"
Y1 Y2 Y4: library part CRYSTAL, "Crystal"

## Free pads (board coordinates)
  round 5 on Bottom Overlay mask+0.2: 2(95.48,48.335)

## Via types
v1: diameter 1, hole 0.6, Top Layer to Bottom Layer, 120 vias
v2: diameter 1.27, hole 0.711, Top Layer to Bottom Layer, 9 vias
v3: diameter 1.2, hole 0.8, Top Layer to Bottom Layer, 6 vias

## Nets (pads, with @x,y where several pads share a name; then routed paths per layer and width w, separated by ;. In a path a pad name is that pad's centre, name@x,y a point inside that pad or via, vN(x,y) a via of type N, cw(c..) or ccw(c..) an arc to the next point about the centre after c; other vN are vias at no path point)
1V8: C33.1 C77.1 C86.2 R8.2 R68.2 R70.1 U7.2 U7.9 U7.10 U12.5 U26.1 | length 204.6
  Top Layer w0.2: C86.2@56.137,32.64 56.137,34.937 56.4,35.2 ; U7.2@57.764,34.267 56.831,35.2 56.4,35.2 ; 59.55,29 63.85,33.3 108,33.3 v1(113.2,28.1) ; 59.8,38.6 56.4,35.2 ; R68.2@60.807,41.082 59.8,40.075 59.8,38.666 U7.9@60.981,37.485 U7.10@61.441,37.944 ; U26.1@118.984,20.517 119.702,20.517 C77.1@120.421,19.798 122.319,17.9 v1(123.4,17.9)
  Top Layer w0.4: C86.2@56.137,32.64 59.55,29.227 59.55,29 v1(59.55,12.25) 64.146,16.846 65.442,16.846 U12.5@68.334,19.738
  Bottom Layer w0.2: R8.2@116.868,30.912 114.056,28.1 v1(113.2,28.1) v1(123.4,17.9)
  Bottom Layer w0.4: R70.1@3.048,15.24 3.048,16.948 4.3,18.2 7.8,18.2 10.3,20.7 14.4,20.7 17.9,17.2 17.9,13.4 19.6,11.7 22.6,11.7 24.9,9.4 24.9,6.5 27.6,3.8 47.2,3.8 52.9,9.5 56.8,9.5 v1(59.55,12.25)
1V8_USB: C64.1 C65.1 C66.1 C75.1 U25.12 U25.37 U25.49 U25.64 | length 39
  Top Layer w0.2: v1(93.606,13.706) U25.49@95.134,13.706 ; U25.37@99.024,20.847 100.1,19.771 v1(100.1,19.7) ; v1(100.9,7.3) 100.9,7.94 U25.64@100.438,8.402 101.4,9.365 101.4,10.6 104.4,13.6 v1(106.271,13.6) U25.12@107.58,12.291
  Top Layer w0.3: v1(93.606,13.706) 95.307,15.407 100.493,15.407 101.4,14.5 101.4,10.6 ; v1(100.1,19.7) 100.1,15.8 100.7,15.2
  Bottom Layer w0.2: v1(93.606,13.706) 93.776,13.876 C75.1@93.776,14.732 ; C65.1@98.663,20.606 99.194,20.606 v1(100.1,19.7) ; v1(100.9,7.3) 101.396,7.796 C66.1@101.396,9.144 ; v1(106.271,13.6) 106.271,12.999 C64.1@106.925,12.344
3V3: 3V3.0 C1.1 C3.1 C12.2 C13.1 C14.1 C18.1 C19.2 C21.1 C22.2 C23.1 C24.2 C25.1 C26.1 C32.1 C87.1 C88.2 J4.1 J4.2 R2.2 R11.2 R12.2 R13.2 R14.2 R15.2 R21.2 R27.1 R38.1 R40.1 R42.1 R60.1 R64.1 U1.2 U3.8 U6.J1_66 U6.J1_67 U6.J4_1 U6.J4_2 U7.19 U10.10 U10.12 U10.28 U10.42 U10.54 U10.71 U10.84 U10.96 U12.1 U12.3 U22.5 | length 426.5
  Top Layer w0.2: R12.2@25.925,30.988 R11.2@25.925,33.444 25.956,33.444 26.824,32.576 U10.84@27.952,32.576 28.924,32.576 v1(29.8,31.7) 32.6,31.7 32.6,33.6 32.4,33.8 ; v1(27.8,39.7) 27.8,38.4 32.4,33.8 ; U10.96@27.952,26.576 29.076,26.576 v1(29.9,27.4) 36.9,27.4 ; U10.71@31.952,38.576 31.952,36.948 v1(32.4,36.5) 32.4,33.8 ; v1(34.4,8.7) 34.4,11.2 35.7,12.5 35.7,19.604 v1(34.452,20.852) U10.10@34.452,22.576 ; U10.12@35.452,22.576 v1(35.452,24.448) ; v2@39.2,26.7 v2(39.4,26.5) 40.324,25.576 v1(41.976,25.576) U10.28@43.952,25.576 ; 39.2,29.752 v1(42.024,32.576) U10.42@43.952,32.576 ; U10.54@40.452,38.576 40.452,37.548 v1(41.1,36.9) 42.5,36.9 43.7,38.1 50.3,38.1 ; C87.1@51.557,37.4 50.857,38.1 50.3,38.1 ; U7.19@53.253,38.779 52.331,39.7 51.9,39.7 50.3,38.1 ; U6.J4_1@129.048,30.318 v1(129.048,32.748) 129.448,32.348 U6.J4_2@129.448,30.318 ; U6.J1_66@141.048,68.618 v1(141.048,70.748) 141.448,70.348 U6.J1_67@141.448,68.618
  Top Layer w0.3: R42.1@3.048,14.224 R40.1@5.08,14.224 R38.1@7.112,14.224 v1(7.112,16.812) 10.7,20.4 15.22,20.4 J4.2@19.956,15.664 ; v1(22.103,42.7) 22.736,42.7 C3.1@24.188,44.151 ; J4.1@22.496,15.664 23.864,15.664 26.8,18.6 30.8,18.6 33.052,20.852 v1(34.452,20.852) ; U12.3@68.814,22.92 68.4,22.506 68.4,21.7 69,21.1 69.695,21.1 U12.1@70.165,21.57 71.602,23.006 C32.1@71.602,23.725 73.8,25.923 73.8,30.8 73.8,30.9 73.85,30.95 83.55,30.95 90.388,24.112 U22.5@93.638,24.112 94.15,23.6 94.7,23.6 96.637,25.537 C88.2@96.637,26.142
  Top Layer w0.4: 32.6,31.7 36.9,27.4 37.8,26.5 ; v1(35.452,24.448) 37.504,26.5 37.8,26.5 ; v2@39.2,26.7 39.2,29.752 39.2,32.7 41.1,34.6 v1(41.1,36.9) ; v2(39.4,26.5) 37.8,26.5
  Top Layer w0.5: 3V3.0@120.42,50.492 127.408,50.492 v1(129,48.9) ; v1(129.048,32.748) 135.5,39.2 v1(135.5,47.1)
  Top Layer w1: v1(62.1,27.8) 65.1,30.8 v1@73.8,30.8 ; 3V3.0@116.711,46.784 3V3.0@120.42,50.492
  Bottom Layer w0.2: U3.8@22.883,43.48 24.363,42 26.9,42 27.8,41.1 v1(27.8,39.7) ; C14.1@26.532,30.404 C13.1@27.972,31.844 ; C13.1@28.116,31.7 v1(29.8,31.7) ; C12.2@28.44,27.349 v1@29.849,27.349 ; v1@32.385,36.515 C19.2@32.385,38.1 ; C1.1@33.016,8.7 v1(34.4,8.7) ; C26.1@33.528,21.336 33.968,21.336 v1(34.452,20.852) v1@34.8,21.2 ; v1(35.452,24.448) 36.06,23.84 C23.1@36.06,22.396 ; C24.2@41.013,38.652 41.1,38.565 v1(41.1,36.9) R21.2@43.999,36.9 ; v1(41.976,25.576) 42.352,25.952 C18.1@43.68,25.952 ; v1(42.024,32.576) 42.325,32.877 C22.2@43.76,32.877 44.993,32.877 C21.1@45.72,33.604
  Bottom Layer w0.3: R64.1@5.08,15.24 R60.1@7.112,15.24 v1(7.112,16.812) ; J4.2@19.956,15.664 J4.1@22.496,15.664 25.064,15.664 26.289,16.889 26.289,18.288 26.289,20.828 R13.2@26.289,22.3 ; v1(22.103,42.7) U3.8@22.883,43.48
  Bottom Layer w0.4: C1.1@33.016,8.7 33.016,10.511 U1.2@33.28,10.775 R2.2@35.312,10.775 ; v1(34.452,20.852) 35.1,21.5 35.1,24.096 v1(35.452,24.448) ; C25.1@35.675,28.563 37.739,26.5
  Bottom Layer w0.5: v1(129,48.9) 130.8,47.1 v1(135.5,47.1)
  Bottom Layer w1: 37.739,26.5 v2(39.4,26.5) 40.3,26.5 45.8,21 47.9,21 54.7,27.8 v1(62.1,27.8) ; v1(73.7,30.9) 73.7,32 79.7,38 108.104,38 3V3.0@116.84,46.736 ; 3V3.0@120.42,50.492 125.3,55.373 125.3,71.6 128.5,74.8 139.9,74.8 141.048,73.652 v1(141.048,70.748)
3V3_USB: C67.1 C68.1 C69.1 C70.1 C71.1 C76.2 C78.1 L2.1 L3.1 R48.2 R49.2 R50.2 R53.2 R54.2 R55.2 TP18.0 U21.5 U25.20 U25.31 U25.42 U25.50 U25.56 U26.14 U27.6 U27.8 | length 143.6
  Top Layer w0.2: U25.50@95.488,13.352 96.053,13.917 96.053,14.753 96.257,14.957 99.264,14.957 v1(100.3,13.921) ; U25.42@97.256,19.08 v1(98.635,17.7) ; U25.56@97.609,11.231 v1(98.779,12.4) ; v1@103.479,19.721 103.479,21.343 U25.31@104.044,21.908 ; v1(103.5,19.7) 103.5,18.8 105.4,16.9 ; v1(106.814,16.9) U25.20@107.933,18.019 109.626,19.712 R54.2@109.626,20.849 ; U21.5@112.342,2.312 112.342,1.57 C71.1@112.896,1.016 ; U26.14@114.317,15.85 115.122,15.044 C76.2@115.122,14.5 115.922,13.7 v1(119.476,13.7)
  Top Layer w0.4: C78.1@82.212,5.464 82.339,5.591 U27.6@84.692,5.591 86.302,5.591 86.911,6.2 ; R53.2@83.596,11.923 83.596,10.2 TP18.0@84.524,9.272 ; U27.8@84.692,3.051 86.362,3.051 86.911,3.6 ; R55.2@85.628,11.923 85.628,10.376 TP18.0@84.524,9.272 ; R49.2@86.911,1.4 86.911,3.6 ; R48.2@87.299,9.144 87.171,9.272 TP18.0@84.524,9.272 ; TP18.0@84.524,9.272 86.911,6.885 86.911,6.2 ; 86.911,3.6 86.911,6.2
  Top Layer w0.5: v1(98.779,12.4) v1(100.3,13.921) ; v1(102.5,16.1) 103.3,16.9 105.4,16.9 v1(106.814,16.9) ; U21.5@112.342,2.312 109.188,2.312 107.7,3.8 107.7,4.9 108.4,5.6 118.4,5.6 L3.1@116.38,7.62 ; L2.1@119.476,12.2 v1(119.476,13.7)
  Bottom Layer w0.2: C69.1@96.508,18.451 97.259,17.7 v1(98.635,17.7) ; C70.1@97.586,11.626 98.005,11.626 v1(98.779,12.4) ; v1@102.435,16.035 v1(102.5,16.1) ; v1(103.5,19.7) 103.5,21.364 103.82,21.684 C68.1@104.051,21.684 ; v1(106.814,16.9) 106.814,17.981 C67.1@107.284,18.451
  Bottom Layer w0.4: TP18.0@84.524,9.272 93.251,9.272 ; R50.2@89.832,5.853 93.251,9.272 ; v1(98.635,17.7) 100.9,17.7 v1(102.5,16.1) v1@100.321,13.921 ; v1(98.779,12.4) 98.779,11.279 96.772,9.272 93.251,9.272 ; v1(106.814,16.9) 108.4,16.9 109.9,18.4 114.776,18.4 v1(119.476,13.7)
  Bottom Layer w0.5: v1(118.8,5.2) 119.476,5.876 v1(119.476,13.7)
5V: 5V.0@79.756,66.548 5V.0@79.756,69.596 D4.K D5.K R26.2 | length 44
  Top Layer w2: D5.K@72.274,39.486 75.286,39.486 79.756,43.956 5V.0@79.756,66.548 ; D4.K@74.928,66.548 5V.0@79.756,66.548 ; 5V.0@79.756,69.596 5V.0@79.756,66.548 ; R26.2@83.947,66.548 5V.0@79.756,66.548
5V_ISOLATED: C30.1 C56.1 C57.1 D4.A R33.2 U11.7 U19.6 U19.11 U19.12 | length 50.9
  Top Layer w0.3: R33.2@65.278,61.976 65.278,63.578 65.6,63.9 69,63.9 71.3,61.6 71.3,56.4 68.748,53.848 U19.6@67.766,53.848
  Top Layer w0.5: C57.1@60.96,60.02 C57.1@61.392,60.02 ; C56.1@63.32,58.748 C56.1@62.992,58.42 64.188,58.42 ; U19.11@65.156,58.748 U19.12@64.516,58.748 64.516,61.214 R33.2@65.278,61.976
  Top Layer w1: C57.1@60.96,60.02 63.244,60.02 U19.12@64.516,58.748
  Top Layer w2: U11.7@55.372,73.66 57.34,73.66 58.928,72.072 D4.A@58.928,66.548 60.96,64.516 C57.1@60.96,60.02
  Bottom Layer w0.5: C30.1@53.34,69.596 53.34,71.628 U11.7@55.372,73.66
5V_ISOLATED_VSENSE: U6.J1_40
\RESET_FTDI: R47.1 R51.2 RESET_FTDI.0 U22.1 U25.14 U26.8 | length 40.2
  Top Layer w0.2: RESET_FTDI.0@94.284,20.828 95.47,22.014 U22.1@95.47,22.281 ; v1(100.2,23.8) 103.7,23.8 106.2,26.3 108.1,26.3 112.7,21.7 112.7,19.748 U26.8@111.559,18.608 110.6,17.648 v1(110.6,16.6) ; U25.14@108.287,12.999 v1(109.5,11.785)
  Bottom Layer w0.2: RESET_FTDI.0@94.284,20.828 97.256,23.8 v1(100.2,23.8) ; R47.1@108.005,9.652 R47.1@108,9.652 109.5,11.152 v1(109.5,11.785) 110.6,12.885 v1(110.6,16.6)
AD0: U6.J4_56
AD1: U6.J4_53
AD2: U6.J4_15
AD3: U6.J4_17
AD4: U6.J4_19
AD5: U6.J4_21
AD6: U6.J4_51
AD7: U6.J4_49
CAN_3V3: C2.1 C5.2 C8.1 U2.3 U3.1 U5.1 U5.2 | length 52.3
  Top Layer w0.5: v3(13,50.8) 13.332,50.468 C2.1@15.232,50.468 16.068,50.468 16.7,51.1 ; v3(16.7,61.3) 16.7,51.1 ; v3(19.2,45.4) 19.2,47.066 C5.2@19.967,47.833 16.7,51.1
  Bottom Layer w0.5: U5.2@10.716,74.459 U5.1@10.716,75.729 ; v3(13,50.8) U2.3@15.243,50.8 ; C8.1@13.907,75.729 U5.1@10.716,75.729 ; v3(16.7,61.3) 17.5,62.1 17.5,74.9 15.3,77.1 12.087,77.1 U5.1@10.716,75.729 ; v3(19.2,45.4) 19.206,45.406 U3.1@19.206,47.157
CAN_5V: J1.1 J2.1 | length 19.7
  Top Layer w1: J2.1@6.296,34.312 6.296,35.396 7.7,36.8 9.2,38.3 9.2,48.68 J1.1@6.296,51.584
CAN_12V: C7.1 C29.1 C31.1 CAN_12V.0 D3.K F1.2 U5.5 U5.7 U5.8 U11.1 | length 54
  Top Layer w1.5: F1.2@3.556,69.733 3.556,77.216 CAN_12V.0@3.048,77.724 8.576,77.724 11.4,74.9 ; D3.K@8.128,74.136 10.636,74.136 11.4,74.9 ; C31.1@14.224,77.216 16.54,74.9 ; U11.1@19.812,73.66 18.572,74.9 16.54,74.9 ; 11.4,74.9 16.54,74.9
  Bottom Layer w0.5: CAN_12V.0@2.54,77.216 4.029,77.216 U5.8@5.516,75.729 ; C7.1@3.085,75.729 U5.8@5.516,75.729 ; U5.5@5.516,71.919 6.819,71.919 7.3,72.4 7.3,73.9 6.741,74.459 U5.7@5.516,74.459 U5.8@5.516,75.729 ; U11.1@19.812,73.66 20.828,72.644 C29.1@20.828,69.088
  Bottom Layer w1.5: C7.1@2.54,75.184 2.54,77.216 CAN_12V.0@3.048,77.724
CAN_H_1: J1.4 J2.4 U2.7 | length 31.4
  Bottom Layer w0.254: J2.4@4.112,31.696 5.623,33.207 8.407,33.207 9,33.8 9,46 6.9,48.1 4.979,48.1 J1.4@4.112,48.968 5.801,50.657 6.68,50.657 8.142,52.119 U2.7@10.092,52.119
CAN_L_1: J1.5 J2.5 U2.6 | length 25.3
  Bottom Layer w0.254: J2.5@6.296,32.28 8.122,32.28 9.454,33.612 9.454,46.394 J1.5@6.296,49.552 7.593,50.849 U2.6@10.092,50.849
CANGND: C2.2 C5.1 C7.2 C8.2 C29.2 C31.2 CANGND.0 D3.A J1.3 J2.3 R7.2 R20.2 U2.2 U3.4 U5.4 U11.2 U11.3 | length 147.9
  Top Layer w0.254: R7.2@2.159,21.844 2.159,31.343 J2.3@4.112,33.296
  Top Layer w0.5: D3.A@8.128,70.136 9.208,71.216 C31.2@14.224,71.216 ; v3(13.1,52.7) 13.935,51.865 C2.2@15.232,51.865 ; C5.1@20.955,48.821 v3(22.8,50.666)
  Top Layer w1: C31.2@14.224,71.216 17.284,71.216 19.812,68.688 U11.2@19.812,63.5 U11.3@19.812,58.42
  Bottom Layer w0.5: 2.54,71.7 4.04,70.2 8.997,70.2 U5.4@10.716,71.919 13.907,71.919 C8.2@14.212,72.224 ; CANGND.0@13.1,58.312 v3(13.1,52.7) 13.681,52.119 U2.2@15.292,52.119 ; 19.812,56.515 19.812,53.3 19.812,51.939 U3.4@21.9,49.851 22.715,50.666 v3(22.8,50.666)
  Bottom Layer w1: U11.3@19.812,58.42 22,60.608 22,66.519 C29.2@20.828,67.691
  Bottom Layer w1.5: 2.54,60.86 2.54,71.7 C7.2@2.54,72.898 ; J2.3@4.112,33.296 3.52,33.296 1.4,35.416 1.4,48.448 J1.3@3.52,50.568 ; J1.3@4.112,50.568 J1.3@3.52,50.568 ; R20.2@21.463,54.864 19.812,56.515 U11.3@19.812,58.42 CANGND.0@13.208,58.42 10.18,58.42 7.8,60.8 2.6,60.8 1.2,59.4 1.2,52.888 J1.3@3.52,50.568
DBGACK: J4.19 R19.2 | length 1.8
  Bottom Layer w0.3: J4.19@22.225,38.795 R19.2@22.225,40.64
DBGRQ: J4.17 R18.2 | length 5.8
  Bottom Layer w0.3: R18.2@17.416,34.333 17.683,34.6 21.112,34.6 J4.17@22.496,35.984
FB: R32.2 R36.2 U19.5 | length 8.1
  Top Layer w0.3: U19.5@67.116,53.848 67.116,52.384 67.945,51.555 R32.2@67.945,50.8 69.1,50.8 v1(70,51.7)
  Bottom Layer w0.3: R36.2@68.072,52.451 69.249,52.451 v1(70,51.7)